# Allegro board AndyLesson.brd
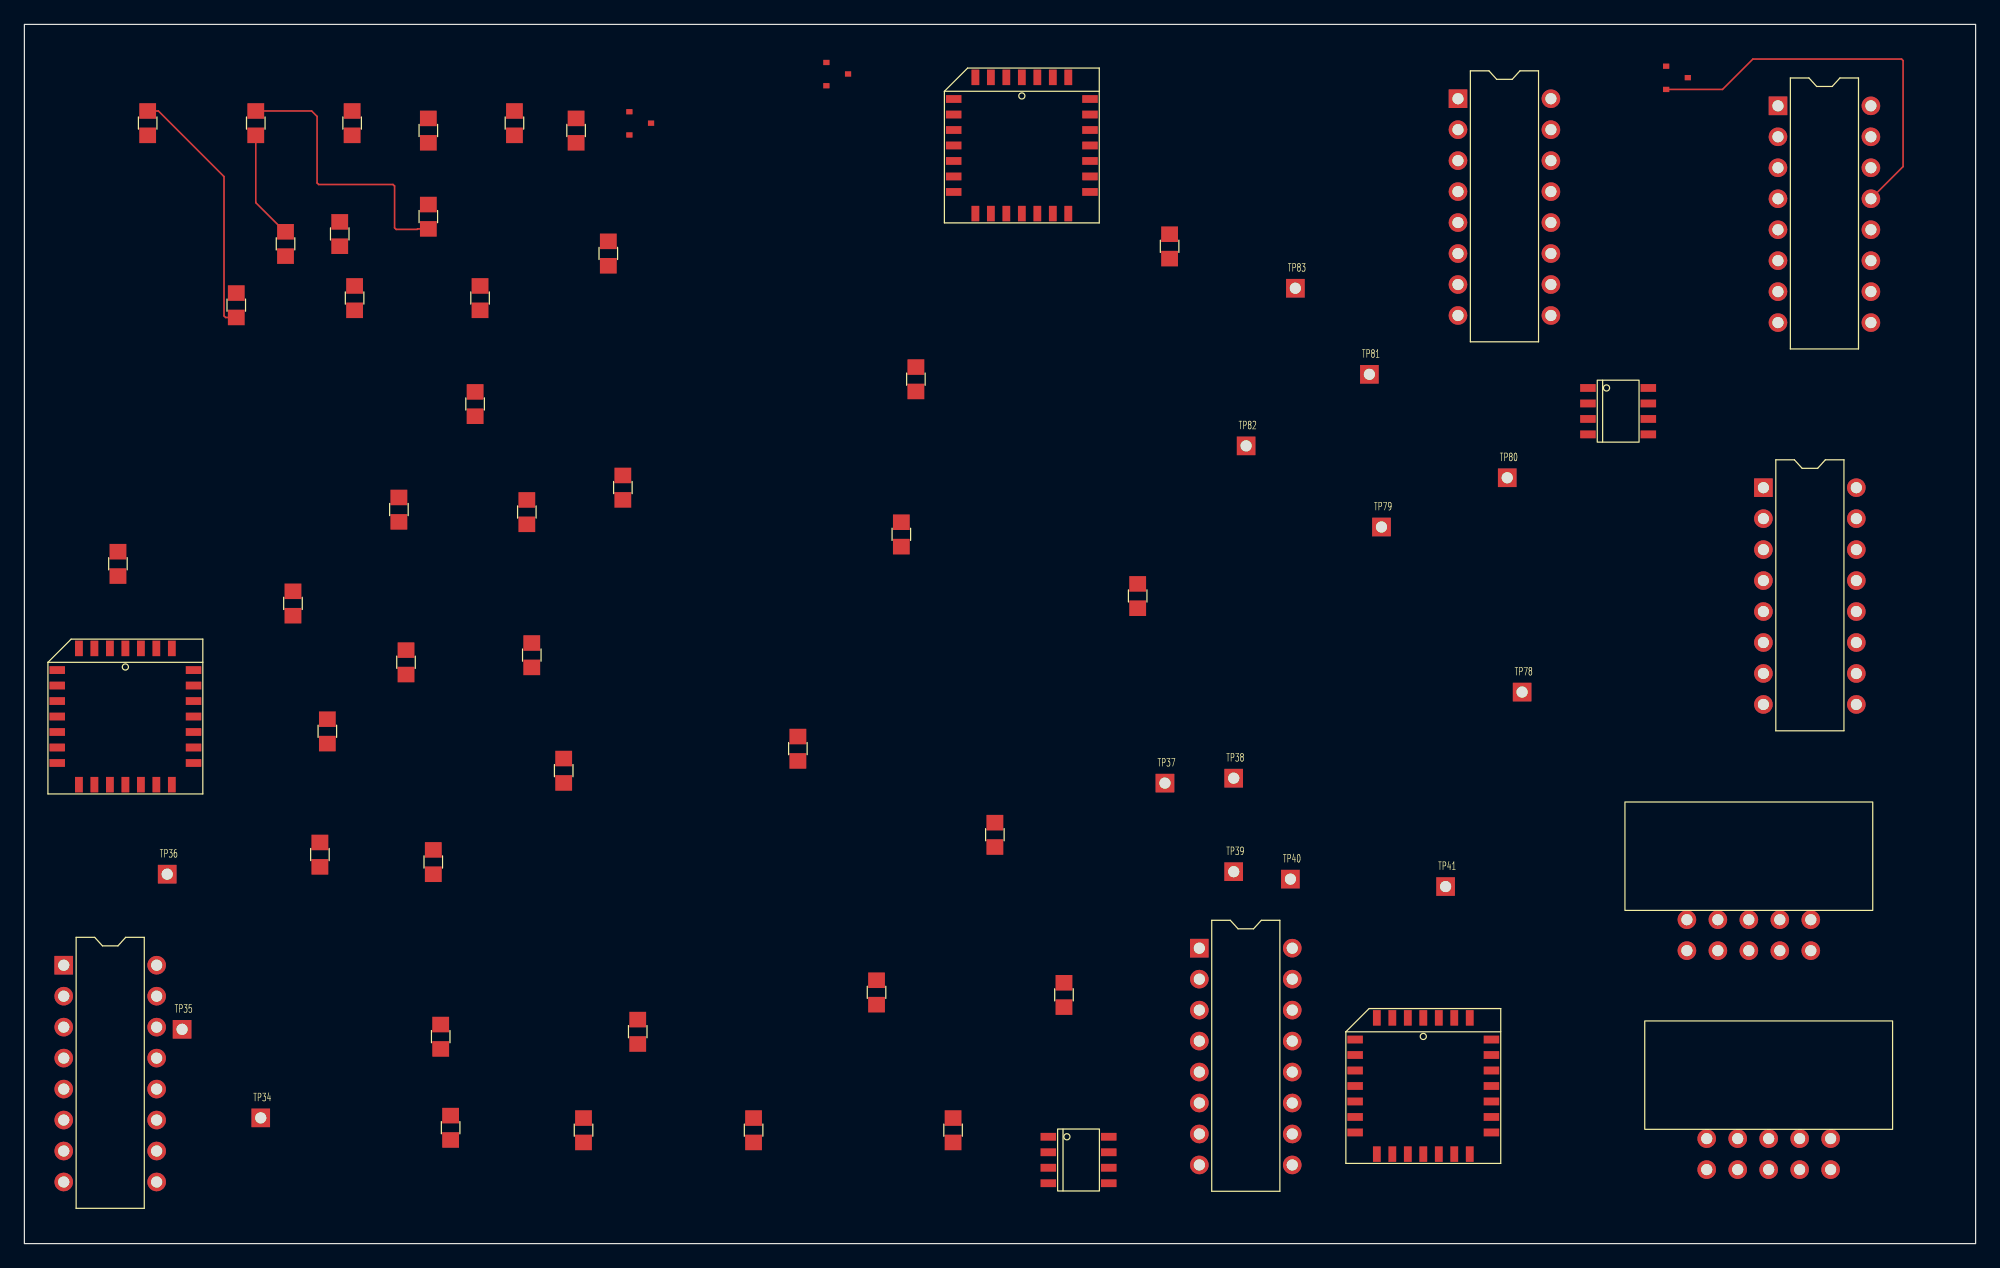
[diagram p0: board, top side]
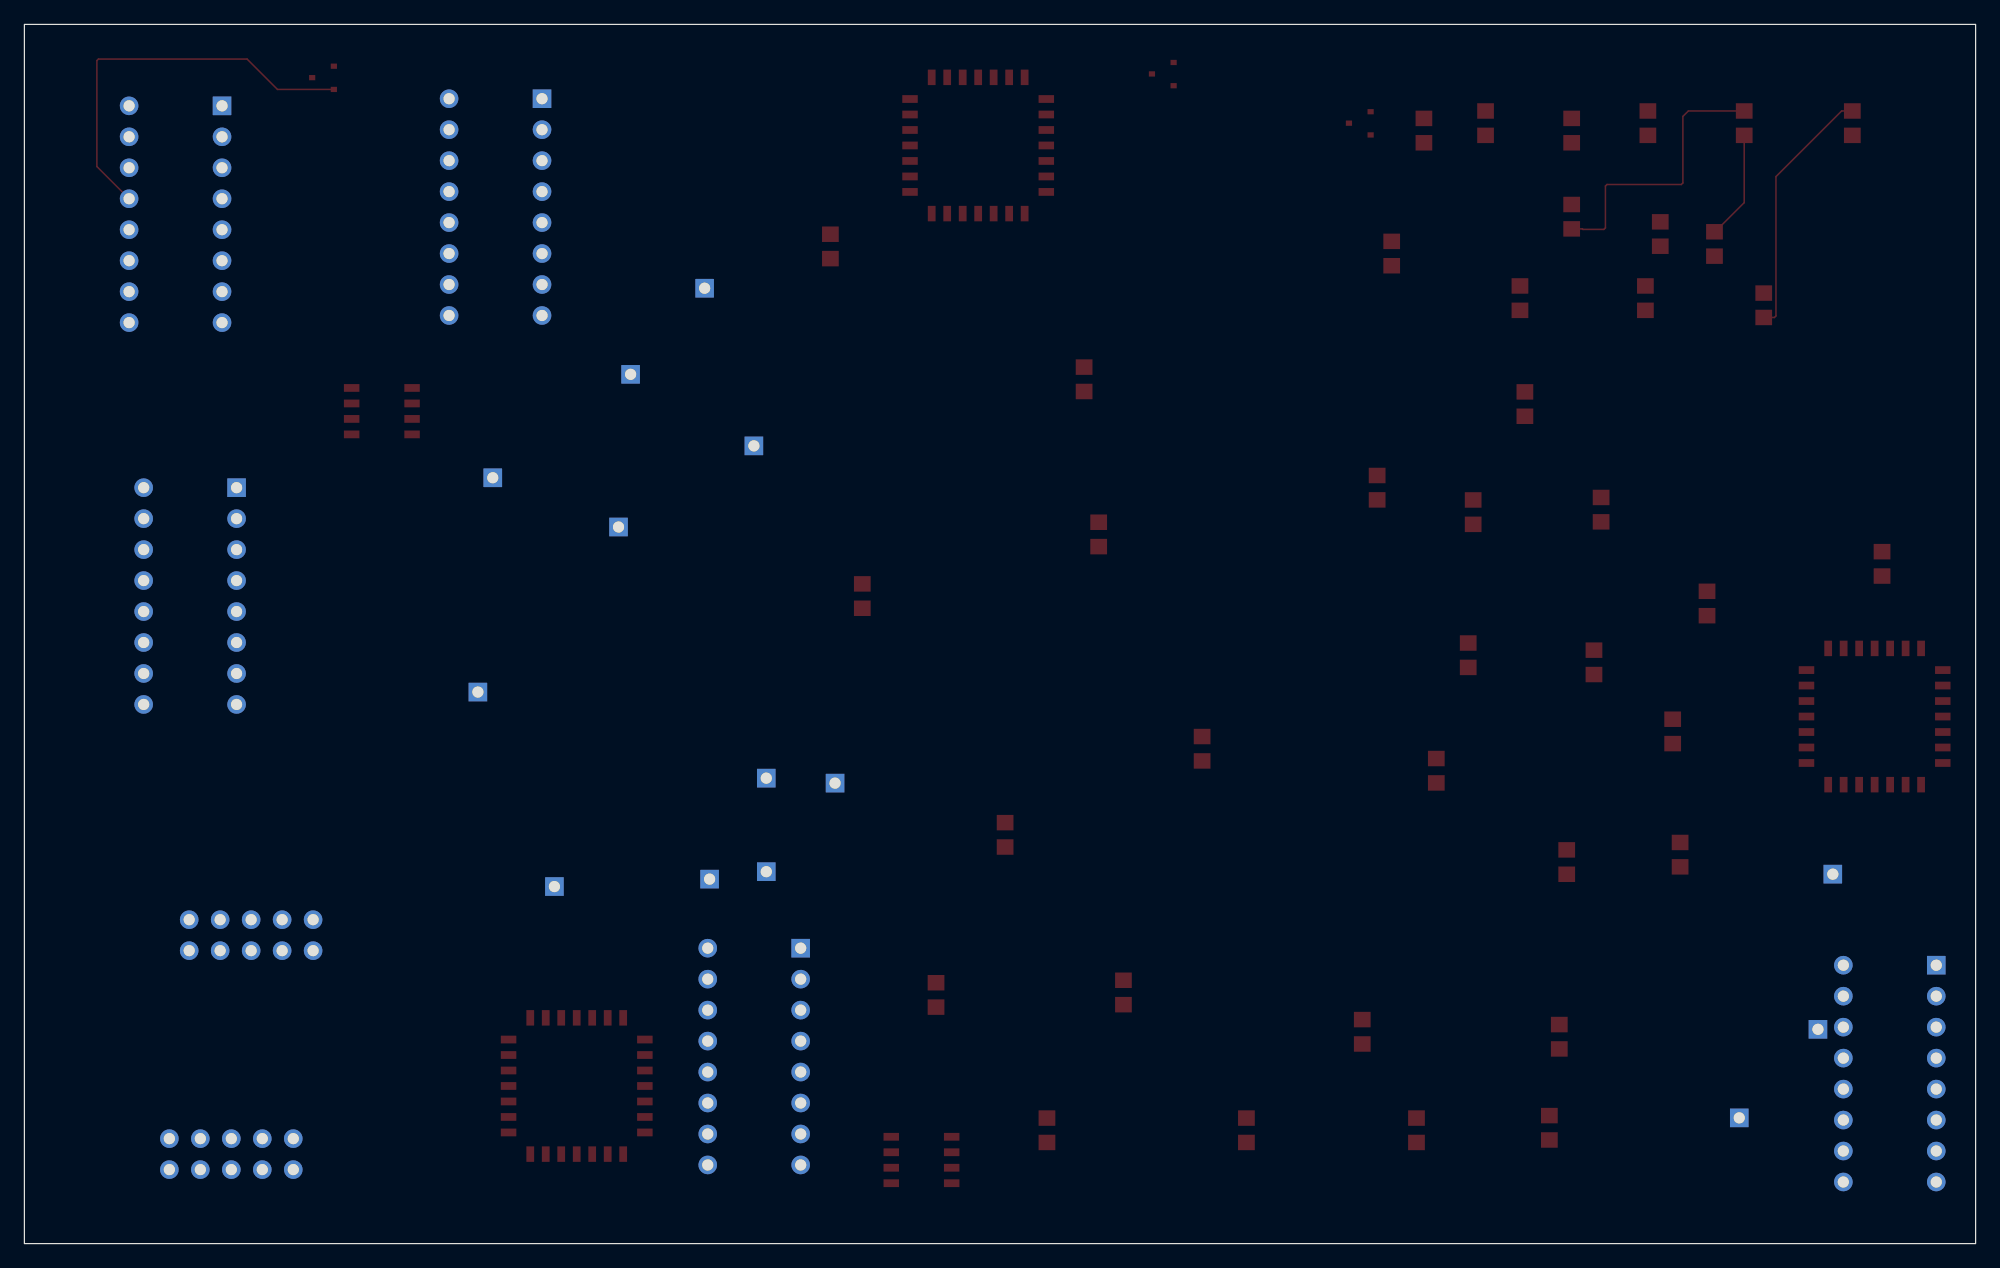
[diagram p1: board, bottom side, seen from below]

Outline 159.99 x 100 mm; copper layers: TOP, LAYER2, LAYER3, LAYER4, LAYER5, LAYER6, LAYER7, BOTTOM. Coordinates in mm from the lower left corner of the outline.

## Design rules (mm)
net group POWER: nets POWER<2> POWER<3>
net group BD: nets BD<0> BD<1> BD<2> BD<3> BD<4> BD<5> BD<6> BD<7> BD<8>
net group BD_1: nets BD<0>_1 BD<1>_1 BD<2>_1 BD<3>_1 BD<4>_1 BD<5>_1 BD<6>_1 BD<7>_1 BD<8>_1
net group BD_2: nets BD<0>_2 BD<1>_2 BD<2>_2 BD<3>_2 BD<4>_2 BD<5>_2 BD<6>_2 BD<7>_2
net group BD_3: nets BD<0>_3 BD<1>_3 BD<2>_3 BD<3>_3 BD<4>_3 BD<5>_3 BD<6>_3 BD<7>_3
net group BD_4: nets BD<0>_4 BD<1>_4 BD<2>_4 BD<3>_4 BD<4>_4 BD<5>_4 BD<6>_4 BD<7>_4 BD<8>_2 BD<9> BD<10> BD<11> BD<12> BD<13> BD<14> BD<15>
net group BD_5: nets BD<0>_5 BD<1>_5 BD<2>_5 BD<3>_5 BD<4>_5 BD<5>_5 BD<6>_5 BD<7>_5 BD<8>_3 BD<9>_1 BD<10>_1 BD<11>_1 BD<12>_1 BD<13>_1 BD<14>_1 BD<15>_1
net group BD_ECL: nets BD_ECL<0> BD_ECL<1> BD_ECL<2> BD_ECL<3> BD_ECL<4> BD_ECL<5> BD_ECL<6> BD_ECL<7>
net group BURSTTRIGS: nets BURSTTRIGS<0> BURSTTRIGS<1> BURSTTRIGS<2> BURSTTRIGS<3>
net group BUS: nets BUS<0> BUS<1> BUS<2> BUS<3> BUS<4> BUS<5> BUS<6> BUS<7> BUS<8> BUS<9> BUS<10> BUS<11> BUS<12> BUS<13> BUS<14> BUS<15> BUS<16> BUS<17> BUS<18> BUS<19> BUS<20> BUS<21> BUS<22> BUS<23>
net group BUS_1: nets BUS<0>_1 BUS<1>_1 BUS<2>_1 BUS<3>_1 BUS<4>_1 BUS<5>_1 BUS<6>_1 BUS<7>_1 BUS<8>_1 BUS<9>_1 BUS<10>_1 BUS<11>_1 BUS<12>_1 BUS<13>_1 BUS<14>_1 BUS<15>_1 BUS<16>_1 BUS<17>_1 BUS<18>_1 BUS<19>_1 BUS<20>_1 BUS<21>_1 BUS<22>_1 BUS<23>_1 BUS<24> BUS<25> BUS<26> BUS<27> BUS<28> BUS<29> BUS<30> BUS<31>
net group BUS_2: nets BUS<0>_2 BUS<1>_2 BUS<2>_2 BUS<3>_2 BUS<4>_2 BUS<5>_2 BUS<6>_2 BUS<7>_2
net group BUS_3: nets BUS<0>_3 BUS<1>_3 BUS<2>_3 BUS<3>_3 BUS<4>_3 BUS<5>_3 BUS<6>_3 BUS<7>_3
net group D: nets D<0>
net group D_1: nets D<0>_1
net group EXTTRIG: nets EXTTRIG<0> EXTTRIG<1> EXTTRIG<2> EXTTRIG<3> EXTTRIG<4> EXTTRIG<5> EXTTRIG<6> EXTTRIG<7> EXTTRIG<8> EXTTRIG<9> EXTTRIG<10> EXTTRIG<11> EXTTRIG<12> EXTTRIG<13> EXTTRIG<14> EXTTRIG<15>
net group LOAD: nets LOAD<0> LOAD<1> LOAD<2> LOAD<3> LOAD<4> LOAD<5> LOAD<6> LOAD<7>
net group LOAD_1: nets LOAD<0>_1 LOAD<1>_1 LOAD<2>_1 LOAD<3>_1 LOAD<4>_1 LOAD<5>_1 LOAD<6>_1 LOAD<7>_1
net group PRESCALETRIGS: nets PRESCALETRIGS<0> PRESCALETRIGS<1> PRESCALETRIGS<2> PRESCALETRIGS<3>
net group RAWTRIGS: nets RAWTRIGS<0> RAWTRIGS<1> RAWTRIGS<2> RAWTRIGS<3>
net group RAWTRIGS_1: nets RAWTRIGS<0>_1 RAWTRIGS<1>_1 RAWTRIGS<2>_1 RAWTRIGS<3>_1
net group REG_IN: nets REG_IN<1> REG_IN<2> REG_IN<3> REG_IN<4> REG_IN<5> REG_IN<6> REG_IN<7> REG_IN<8>
net group UNNAMED_1_10E016_I14_P: nets UNNAMED_1_10E016_I14_P<0> UNNAMED_1_10E016_I14_P<1> UNNAMED_1_10E016_I14_P<2> UNNAMED_1_10E016_I14_P<3> UNNAMED_1_10E016_I14_P<4> UNNAMED_1_10E016_I14_P<5> UNNAMED_1_10E016_I14_P<6> UNNAMED_1_10E016_I14_P<7>
net group UNNAMED_1_10E016_I58_P: nets UNNAMED_1_10E016_I58_P<0> UNNAMED_1_10E016_I58_P<1> UNNAMED_1_10E016_I58_P<2> UNNAMED_1_10E016_I58_P<3> UNNAMED_1_10E016_I58_P<4> UNNAMED_1_10E016_I58_P<5> UNNAMED_1_10E016_I58_P<6> UNNAMED_1_10E016_I58_P<7>
net group UNNAMED_1_DS102350_I5_P: nets UNNAMED_1_DS102350_I5_P<0> UNNAMED_1_DS102350_I5_P<1> UNNAMED_1_DS102350_I5_P<2> UNNAMED_1_DS102350_I5_P<3> UNNAMED_1_DS102350_I5_P<4> UNNAMED_1_DS102350_I5_P<5> UNNAMED_1_DS102350_I5_P<6> UNNAMED_1_DS102350_I5_P<7>
net group UNNAMED_1_DS1023500_I1_P: nets UNNAMED_1_DS1023500_I1_P<0> UNNAMED_1_DS1023500_I1_P<1> UNNAMED_1_DS1023500_I1_P<2> UNNAMED_1_DS1023500_I1_P<3> UNNAMED_1_DS1023500_I1_P<4> UNNAMED_1_DS1023500_I1_P<5> UNNAMED_1_DS1023500_I1_P<6> UNNAMED_1_DS1023500_I1_P<7>
net group UNNAMED_1_F269_I2_P: nets UNNAMED_1_F269_I2_P<0> UNNAMED_1_F269_I2_P<1> UNNAMED_1_F269_I2_P<2> UNNAMED_1_F269_I2_P<3> UNNAMED_1_F269_I2_P<4> UNNAMED_1_F269_I2_P<5> UNNAMED_1_F269_I2_P<6> UNNAMED_1_F269_I2_P<7>
net group UNNAMED_1_F269_I4_P: nets UNNAMED_1_F269_I4_P<0> UNNAMED_1_F269_I4_P<1> UNNAMED_1_F269_I4_P<2> UNNAMED_1_F269_I4_P<3> UNNAMED_1_F269_I4_P<4> UNNAMED_1_F269_I4_P<5> UNNAMED_1_F269_I4_P<6> UNNAMED_1_F269_I4_P<7>
net group UNNAMED_1_F269_I8_P: nets UNNAMED_1_F269_I8_P<0> UNNAMED_1_F269_I8_P<1> UNNAMED_1_F269_I8_P<2> UNNAMED_1_F269_I8_P<3> UNNAMED_1_F269_I8_P<4> UNNAMED_1_F269_I8_P<5> UNNAMED_1_F269_I8_P<6> UNNAMED_1_F269_I8_P<7>
net group UNNAMED_1_F269_I14_P: nets UNNAMED_1_F269_I14_P<0> UNNAMED_1_F269_I14_P<1> UNNAMED_1_F269_I14_P<2> UNNAMED_1_F269_I14_P<3> UNNAMED_1_F269_I14_P<4> UNNAMED_1_F269_I14_P<5> UNNAMED_1_F269_I14_P<6> UNNAMED_1_F269_I14_P<7>
net group UNNAMED_1_F269_I20_P: nets UNNAMED_1_F269_I20_P<0> UNNAMED_1_F269_I20_P<1> UNNAMED_1_F269_I20_P<2> UNNAMED_1_F269_I20_P<3> UNNAMED_1_F269_I20_P<4> UNNAMED_1_F269_I20_P<5> UNNAMED_1_F269_I20_P<6> UNNAMED_1_F269_I20_P<7>
net group UNNAMED_1_F269_I20_P_1: nets UNNAMED_1_F269_I20_P<0>_1 UNNAMED_1_F269_I20_P<1>_1 UNNAMED_1_F269_I20_P<2>_1 UNNAMED_1_F269_I20_P<3>_1 UNNAMED_1_F269_I20_P<4>_1 UNNAMED_1_F269_I20_P<5>_1 UNNAMED_1_F269_I20_P<6>_1 UNNAMED_1_F269_I20_P<7>_1
net group UNNAMED_1_F269_I21_P: nets UNNAMED_1_F269_I21_P<0> UNNAMED_1_F269_I21_P<1> UNNAMED_1_F269_I21_P<2> UNNAMED_1_F269_I21_P<3> UNNAMED_1_F269_I21_P<4> UNNAMED_1_F269_I21_P<5> UNNAMED_1_F269_I21_P<6> UNNAMED_1_F269_I21_P<7>
net group UNNAMED_1_F269_I26_P: nets UNNAMED_1_F269_I26_P<0> UNNAMED_1_F269_I26_P<1> UNNAMED_1_F269_I26_P<2> UNNAMED_1_F269_I26_P<3> UNNAMED_1_F269_I26_P<4> UNNAMED_1_F269_I26_P<5> UNNAMED_1_F269_I26_P<6> UNNAMED_1_F269_I26_P<7>
net group UNNAMED_1_F269_I37_P: nets UNNAMED_1_F269_I37_P<0> UNNAMED_1_F269_I37_P<1> UNNAMED_1_F269_I37_P<2> UNNAMED_1_F269_I37_P<3> UNNAMED_1_F269_I37_P<4> UNNAMED_1_F269_I37_P<5> UNNAMED_1_F269_I37_P<6> UNNAMED_1_F269_I37_P<7>

## Placement (name value [footprint] x y rotation side)
C1  0.01UF  [CAP805]  10.11 91.9 0 top
C2  0.01UF  [CAP805]  18.97 91.9 0 top
C3  0.1UF  [CAP805]  26.87 91.9 0 top
C4  0.01UF  [CAP805]  33.12 91.29 0 top
C5  0.01UF  [CAP805]  40.18 91.9 0 top
C7  0.1UF  [CAP805]  45.24 91.29 0 top
NOREF  -  []  0 0 0 top
Q1  -  [SOT23]  50.5 91.9 0 top
R45  130  [RES805]  17.37 76.96 0 top
R46  130  [RES805]  27.08 77.55 0 top
R47  80.6  [RES805]  36.96 68.86 0 top
R48  50  [RES805]  37.36 77.55 0 top
R49  80.6  [RES805]  33.12 84.23 0 top
R50  1000  [RES805]  47.88 81.2 0 top
R51  50  [RES805]  7.67 55.75 0 top
R52  50  [RES805]  21.41 81.99 0 top
R53  499  [RES805]  22.02 52.5 0 top
R54  499  [RES805]  25.86 82.8 0 top
R55  50  [RES805]  30.71 60.2 0 top
R56  50  [RES805]  41.2 59.99 0 top
R57  50  [RES805]  41.61 48.26 0 top
R58  50  [RES805]  31.29 47.68 0 top
R59  50  [RES805]  24.84 42.01 0 top
R60  50  [RES805]  24.23 31.9 0 top
R61  50  [RES805]  33.53 31.29 0 top
R62  50  [RES805]  44.22 38.79 0 top
R63  50  [RES805]  63.42 40.59 0 top
R64  499  [RES805]  71.91 58.17 0 top
R65  499  [RES805]  73.1 70.89 0 top
R66  50  [RES805]  49.07 62 0 top
R67  50  [RES805]  93.9 81.79 0 top
R68  1000  [RES805]  91.29 53.11 0 top
R69  1000  [RES805]  79.58 33.53 0 top
R70  80.6  [RES805]  69.88 20.6 0 top
R71  80.6  [RES805]  50.29 17.37 0 top
R72  130  [RES805]  34.14 16.97 0 top
R73  130  [RES805]  85.24 20.4 0 top
R109  50  [RES805]  76.15 9.3 0 top
R110  1000  [RES805]  59.79 9.3 0 top
R111  50  [RES805]  45.85 9.3 0 top
R112  50  [RES805]  34.95 9.5 0 top
TP34  -  [FEC32DTP]  19.38 10.31 0 top
TP35  -  [FEC32DTP]  12.93 17.58 0 top
TP36  -  [FEC32DTP]  11.71 30.3 0 top
TP37  -  [FEC32DTP]  93.52 37.77 0 top
TP38  -  [FEC32DTP]  99.16 38.18 0 top
TP39  -  [FEC32DTP]  99.16 30.51 0 top
TP40  -  [FEC32DTP]  103.81 29.9 0 top
TP41  -  [FEC32DTP]  116.54 29.29 0 top
TP78  -  [FEC32DTP]  122.81 45.24 0 top
TP79  -  [FEC32DTP]  111.28 58.78 0 top
TP80  -  [FEC32DTP]  121.59 62.81 0 top
TP81  -  [FEC32DTP]  110.29 71.3 0 top
TP82  -  [FEC32DTP]  100.18 65.43 0 top
TP83  -  [FEC32DTP]  104.22 78.36 0 top
U3  ***  [DIP16_3]  117.55 93.9 0 top
U8  -  [SOT23]  135.51 95.63 0 top
U9  ***  [DIP16_3]  143.79 93.32 0 top
U10  ***  [SOIC8]  130.68 68.28 0 top
U11  ***  [DIP16_3]  142.6 62 0 top
U12  -  [CONN10]  136.32 24.03 0 top
U13  -  [CONN10]  137.95 6.07 0 top
U14  ***  [PLCC28]  114.71 12.93 0 top
U15  ***  [DIP16_3]  96.34 24.23 0 top
U16  ***  [SOIC8]  86.44 6.86 0 top
U17  ***  [PLCC28]  81.79 90.07 0 top
U24  -  [SOT23]  66.65 95.94 0 top
U25  ***  [DIP16_3]  3.23 22.83 0 top
U26  ***  [PLCC28]  8.28 43.23 0 top

## Library data of the parts
C1 C2 C4 C5 = CSMD0805: part number: CSMD0805-0.01UF,10%,0805,25V
C3 C7 = CSMD0805: part number: CSMD0805-0.1UF,5%,0805,50V
Q1 = MMBTH81LT1
R45 R46 R72 R73 = RSMD0805: part number: RSMD0805-130,1%,0805
R47 R49 R70 R71 = RSMD0805: part number: RSMD0805-80.6,1%,0805
R48 R51 R52 R55-R63 R66 R67 R109 R111 R112 = RSMD0805: part number: RSMD0805-50,1%,0805
R50 R68 R69 R110 = RSMD0805: part number: RSMD0805-1000,1%,0805
R53 R54 R64 R65 = RSMD0805: part number: RSMD0805-499,1%,0805
TP34-TP41 TP78-TP83 = TESTPOINT_L
U3 U9 U11 U15 U25 = 10H116
U8 U24 = MMBTH10
U10 U16 = LVDS_DRIVER_DS10
U12 U13 = IDS_C10: User Part Number: ***
U14 U17 U26 = 10E116

## Footprints (pads in the part's own frame, mm; a bottom-side part is the same pattern mirrored in y, then rotated)
CAP805
  rect 1.372x1.27 smd: 1(0,1) 2(0,-1)
CONN10
  round 1.524 hole 0.914: 1(0,0) 2(0,2.54) 3(2.54,0) 4(2.54,2.54) 5(5.08,0) 6(5.08,2.54) 7(7.62,0) 8(7.62,2.54) 9(10.16,0) 10(10.16,2.54)
DIP16_3
  rect 1.524x1.524 hole 0.914: 1(0,0)
  round 1.524 hole 0.914: 2(0,-2.54) 3(0,-5.08) 4(0,-7.62) 5(0,-10.16) 6(0,-12.7) 7(0,-15.24) 8(0,-17.78) 9(7.62,-17.78) 10(7.62,-15.24) 11(7.62,-12.7) 12(7.62,-10.16) 13(7.62,-7.62) 14(7.62,-5.08) 15(7.62,-2.54) 16(7.62,0)
FEC32DTP
  rect 1.524x1.524 hole 0.914: 1(0,0)
PLCC28
  rect 0.635x1.27 smd: 1(0,5.588) 2(-1.27,5.588) 3(-2.54,5.588) 4(-3.81,5.588) 12(-3.81,-5.588) 13(-2.54,-5.588) 14(-1.27,-5.588) 15(0,-5.588) 16(1.27,-5.588) 17(2.54,-5.588) 18(3.81,-5.588) 26(3.81,5.588) 27(2.54,5.588) 28(1.27,5.588)
  rect 1.27x0.635 smd: 5(-5.588,3.81) 6(-5.588,2.54) 7(-5.588,1.27) 8(-5.588,0) 9(-5.588,-1.27) 10(-5.588,-2.54) 11(-5.588,-3.81) 19(5.588,-3.81) 20(5.588,-2.54) 21(5.588,-1.27) 22(5.588,0) 23(5.588,1.27) 24(5.588,2.54) 25(5.588,3.81)
RES805
  rect 1.372x1.27 smd: 1(0,1) 2(0,-1)
SOIC8
  rect 1.27x0.635 smd: 1(-2.477,1.905) 2(-2.477,0.635) 3(-2.477,-0.635) 4(-2.477,-1.905) 5(2.477,-1.905) 6(2.477,-0.635) 7(2.477,0.635) 8(2.477,1.905)
SOT23
  rect 0.508x0.432 smd: 1(-0.889,0.94) 2(-0.889,-0.965) 3(0.889,0)

## Nets
GND: C3.1(A<0>) C7.1(A<0>) R47.1(A<0>) R48.1(A<0>) R49.1(A<0>) R68.2(B<0>) R70.1(A<0>) R71.1(A<0>) R109.1(A<0>) TP79.1(A) TP81.1(A) TP83.1(A) U8.3(C) U12.2(PIN2) U12.3(PIN3) U12.7(PIN7) U12.8(PIN8) U13.3(PIN3) U13.4(PIN4) U13.5(PIN5) U13.8(PIN8) U13.9(PIN9) U13.10(PIN10) U14.7 U14.10 U14.13 U14.16 U14.19 U14.22 U17.7 U17.10 U17.13 U17.16 U17.19 U17.22 U24.3(C) U26.7 U26.10 U26.13 U26.16 U26.19 U26.22
GND1: U3.16 U9.16 U11.16 U15.16 U25.16
GND2: U3.1 U9.1 U11.1 U15.1 U25.1
VEE: R50.1(A<0>) R53.1(A<0>) R54.1(A<0>) R64.1(A<0>) R65.1(A<0>) R69.2(B<0>) R110.1(A<0>) U3.8 U9.8 U11.8 U14.1 U15.8 U17.1 U25.8 U26.1
DGTH: U3.7(Y<0>)
DGTL: U3.6(Y*<0>)
GTRIGH: U14.20(Y<0>)
GTRIGH_ECL: R60.2(B<0>) U12.1(PIN1) U14.23(A<0>) U15.13(A<0>)
GTRIGL: U14.21(Y*<0>)
GTRIGL_ECL: R62.2(B<0>) U12.6(PIN6) U14.24(B*<0>) U15.12(B*<0>)
SYNC24H_ECL: R59.2(B<0>) U12.5(PIN5) U15.10(A<0>)
SYNC24H_LVDS: U13.6(PIN6) U16.7(OUT+)
SYNC24L_ECL: U12.10(PIN10) U15.9(B*<0>)
SYNC24L_LVDS: U13.7(PIN7) U16.6(OUT-)
SYNCH_ECL: R57.2(B<0>) U3.5(A<0>) U12.4(PIN4)
SYNCH_LVDS: U10.7(OUT+) U13.1(PIN1)
SYNCL_ECL: R58.2(B<0>) U3.4(B*<0>) U12.9(PIN9)
SYNCL_LVDS: U10.6(OUT-) U13.2(PIN2)
UNNAMED_1_10E101_I12_D: U15.3(Y<0>)
UNNAMED_1_10E116_I7_A: U26.25(A<0>) U26.27(A<0>)
UNNAMED_1_10E116_I7_B: U26.26(B*<0>) U26.28(B*<0>)
UNNAMED_1_10E116_I7_Y: U26.17(Y<0>)
UNNAMED_1_10E116_I8_Y_1: U26.14(Y<0>)
UNNAMED_1_10E116_I22_Y_1: TP80.1(A) U17.8(Y<0>)
UNNAMED_1_10E116_I23_Y_1: TP82.1(A) U26.20(Y<0>)
UNNAMED_1_10E116_I43_A: U14.25(A<0>)
UNNAMED_1_10E116_I43_B: U14.26(B*<0>)
UNNAMED_1_10E116_I43_Y: U14.18(Y*<0>)
UNNAMED_1_10E116_I43_Y_1: U14.17(Y<0>)
UNNAMED_1_10E116_I48_A: U26.3(A<0>)
UNNAMED_1_10E116_I48_B: U26.4(B*<0>)
UNNAMED_1_10E116_I48_Y: U26.8(Y<0>)
UNNAMED_1_10E116_I57_A: U26.5(A<0>)
UNNAMED_1_10E116_I57_B: U26.6(B*<0>)
UNNAMED_1_10E116_I57_Y: U26.11(Y<0>)
UNNAMED_1_10E116_I93_A: U14.27(A<0>)
UNNAMED_1_10E116_I93_B: U14.28(B*<0>)
UNNAMED_1_10E116_I93_Y: U14.14(Y<0>)
UNNAMED_1_10E116_I93_Y_1: U14.15(Y*<0>)
UNNAMED_1_10E116_I101_A: U14.5(A<0>)
UNNAMED_1_10E116_I101_B: U14.6(B*<0>)
UNNAMED_1_10E116_I101_Y: U14.12(Y*<0>)
UNNAMED_1_10E116_I101_Y_1: U14.11(Y<0>)
UNNAMED_1_10E116_I109_A: U14.3(A<0>)
UNNAMED_1_10E116_I109_B: U14.4(B*<0>)
UNNAMED_1_10E116_I109_Y: U14.9(Y*<0>)
UNNAMED_1_10E116_I109_Y_1: U14.8(Y<0>)
UNNAMED_1_10E116_I117_A: U17.23(A<0>)
UNNAMED_1_10E116_I117_B: U17.24(B*<0>)
UNNAMED_1_10E116_I117_Y: U17.21(Y*<0>)
UNNAMED_1_10E116_I117_Y_1: U17.20(Y<0>)
UNNAMED_1_10E116_I125_A: U17.25(A<0>)
UNNAMED_1_10E116_I125_B: U17.26(B*<0>)
UNNAMED_1_10E116_I125_Y: U17.18(Y*<0>)
UNNAMED_1_10E116_I125_Y_1: U17.17(Y<0>)
UNNAMED_1_10E116_I133_A: U17.27(A<0>)
UNNAMED_1_10E116_I133_B: U17.28(B*<0>)
UNNAMED_1_10E116_I133_Y: U17.15(Y*<0>)
UNNAMED_1_10E116_I133_Y_1: U17.14(Y<0>)
UNNAMED_1_10E116_I138_A: U17.5(A<0>)
UNNAMED_1_10E116_I138_B: U17.6(B*<0>)
UNNAMED_1_10E116_I138_Y: U17.11(Y<0>)
UNNAMED_1_10E116_I138_Y_1: U17.12(Y*<0>)
UNNAMED_1_10H116_I6_A: U15.5(A<0>)
UNNAMED_1_10H116_I6_B: U15.4(B*<0>)
UNNAMED_1_10H116_I11_Y: Q1.2(B) R63.2(B<0>) U15.15(Y<0>)
UNNAMED_1_10H116_I15_Y: R64.2(B<0>) R67.1(A<0>) U15.7(Y<0>)
UNNAMED_1_10H116_I15_Y_1: R65.2(B<0>) R66.1(A<0>) U15.6(Y*<0>)
UNNAMED_1_10H116_I20_A: R110.2(B<0>) U24.2(E) U25.13(A<0>)
UNNAMED_1_10H116_I20_B: C7.2(B<0>) U25.11(V) U25.12(B*<0>)
UNNAMED_1_10H116_I20_Y: R111.2(B<0>) U17.3(A<0>) U25.15(Y<0>) U26.23(A<0>)
UNNAMED_1_10H116_I20_Y_1: R112.2(B<0>) U17.4(B*<0>) U25.14(Y*<0>) U26.24(B*<0>)
UNNAMED_1_10H116_I26_Y: R51.2(B<0>) R53.2(B<0>) U3.3(Y<0>)
UNNAMED_1_10H116_I26_Y_1: R52.2(B<0>) R54.2(B<0>) U3.2(Y*<0>)
UNNAMED_1_10H116_I42_A: U3.10(A<0>) U3.13(A<0>)
UNNAMED_1_10H116_I42_B: U3.9(B*<0>) U3.12(B*<0>)
UNNAMED_1_10H116_I59_B: C3.2(B<0>) U9.11(V) U9.12(B*<0>)
UNNAMED_1_10H116_I59_Y: R56.2(B<0>) U9.14(Y*<0>) U11.4(B*<0>) U11.9(B*<0>) U11.12(B*<0>)
UNNAMED_1_10H116_I59_Y_1: R55.2(B<0>) U9.15(Y<0>) U11.5(A<0>) U11.10(A<0>) U11.13(A<0>)
UNNAMED_1_10H116_I62_Y: TP36.1(A) U11.14(Y*<0>)
UNNAMED_1_10H116_I62_Y_1: TP35.1(A) U11.15(Y<0>)
UNNAMED_1_10H116_I63_Y: TP38.1(A) U11.6(Y*<0>)
UNNAMED_1_10H116_I63_Y_1: TP37.1(A) U11.7(Y<0>)
UNNAMED_1_10H116_I64_Y: TP40.1(A) U11.2(Y*<0>)
UNNAMED_1_10H116_I64_Y_1: TP39.1(A) U11.3(Y<0>)
UNNAMED_1_CSMD0805_I20_A: C4.1(A<0>) R66.2(B<0>)
UNNAMED_1_CSMD0805_I20_B: C4.2(B<0>) R71.2(B<0>) R73.2(B<0>) U16.3(IN-)
UNNAMED_1_CSMD0805_I25_A: C5.1(A<0>) R67.2(B<0>)
UNNAMED_1_CSMD0805_I25_B: C5.2(B<0>) R70.2(B<0>) R72.2(B<0>) U16.2(IN+)
UNNAMED_1_CSMD0805_I31_A: C2.1(A<0>) R46.2(B<0>) R49.2(B<0>) U10.3(IN-)
UNNAMED_1_CSMD0805_I31_B: C2.2(B<0>) R52.1(A<0>)
UNNAMED_1_CSMD0805_I33_A: C1.1(A<0>) R45.2(B<0>) R47.2(B<0>) U10.2(IN+)
UNNAMED_1_CSMD0805_I33_B: C1.2(B<0>) R51.1(A<0>)
UNNAMED_1_MMBTH10_I12_B: R109.2(B<0>) TP78.1(A) U24.1(B)
UNNAMED_1_MMBTH10_I51_B: R48.2(B<0>) TP34.1(A) U8.1(B)
UNNAMED_1_MMBTH10_I51_E: R50.2(B<0>) U8.2(E) U9.13(A<0>)
UNNAMED_1_MMBTH81LT1_I3_C: Q1.3(C) R69.1(A<0>)
UNNAMED_1_MMBTH81LT1_I3_E: Q1.1(E) R68.1(A<0>) TP41.1(A)
UNNAMED_1_TESTPOINTL_I16_A: U3.15(Y<0>)
UNNAMED_1_TESTPOINTL_I17_A: U3.14(Y*<0>)
VP3_3: R45.1(A<0>) R46.1(A<0>) R72.1(A<0>) R73.1(A<0>) U10.8 U16.8
VTT: R55.1(A<0>) R56.1(A<0>) R57.1(A<0>) R58.1(A<0>) R59.1(A<0>) R60.1(A<0>) R61.1(A<0>) R62.1(A<0>) R63.1(A<0>) R111.1(A<0>) R112.1(A<0>)

Pads without a net: R61 2; U3 11; U9 2 3 4 5 6 7 9 10; U10 1 4 5; U11 11; U14 2; U15 2 11 14; U16 1 4 5; U17 2 9; U25 2 3 4 5 6 7 9 10; U26 2 9 12 15 18 21

## Routing (per net, layer and track width the routed paths; a pad name or vN(x,y) marks a point on that pad's centre or on a via; arc(x,y) is an arc through that point)
UNNAMED_1_CSMD0805_I31_A: length 23.4
  TOP w0.127: R49.2 32.25,83.23 32.2,83.19 30.48,83.19 30.35,83.31 30.35,86.74 30.23,86.87 24.13,86.87 24,87 24,92.45 23.56,92.9 C2.1
UNNAMED_1_CSMD0805_I31_B: length 8.9
  TOP w0.127: C2.2 18.97,85.38 21.36,82.99 R52.1
UNNAMED_1_CSMD0805_I33_A: length 21
  TOP w0.127: C1.1 10.99,92.9 16.37,87.51 16.37,76.09 16.5,75.96 R45.2
UNNAMED_1_MMBTH10_I51_E: length 32.9
  TOP w0.127: U8.2 139.24,94.67 141.73,97.16 153.92,97.16 154.05,97.03 154.05,88.34 U9.13

## Copper pours and planes (outline as drawn; the poured copper is in the pictures)
VCC on LAYER2: 122.05,35.94 122.05,24.89 127.89,24.89 127.89,35.94
